# Altium PCB dl-6-0-0.PcbDoc
Units mm, origin at the board's own origin, x right, y up, seen from the top; angles counter-clockwise.
Board outline 152.4 x 101.6 mm, 2 copper layers (Top Layer, Bottom Layer); 36 components, 37 nets, 143 pads, 34 vias.
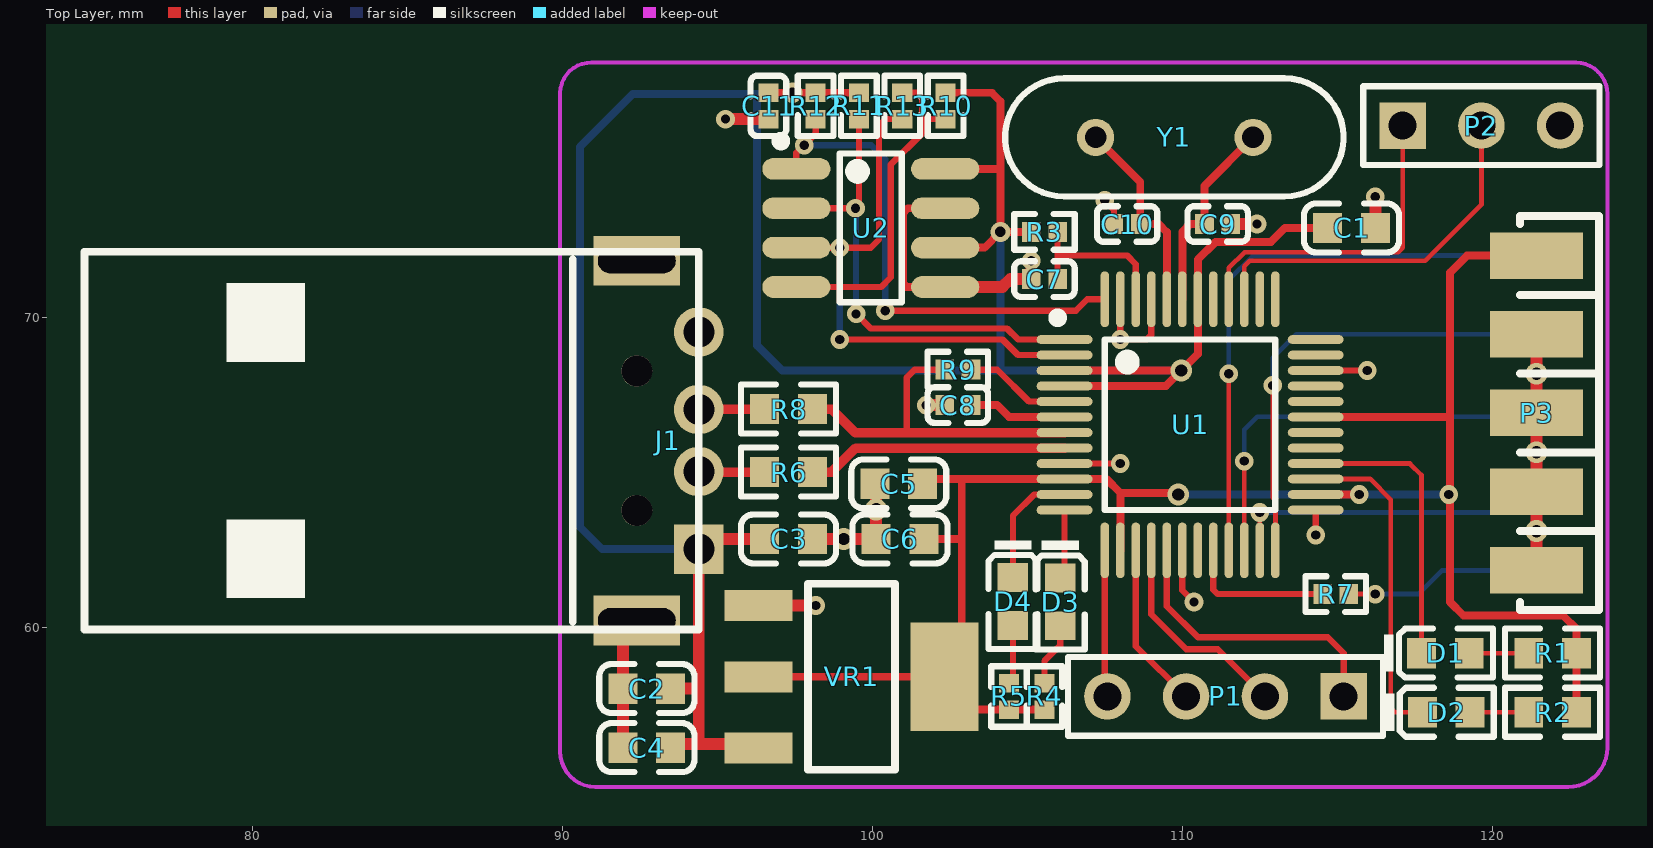
[diagram p0: Top Layer view]
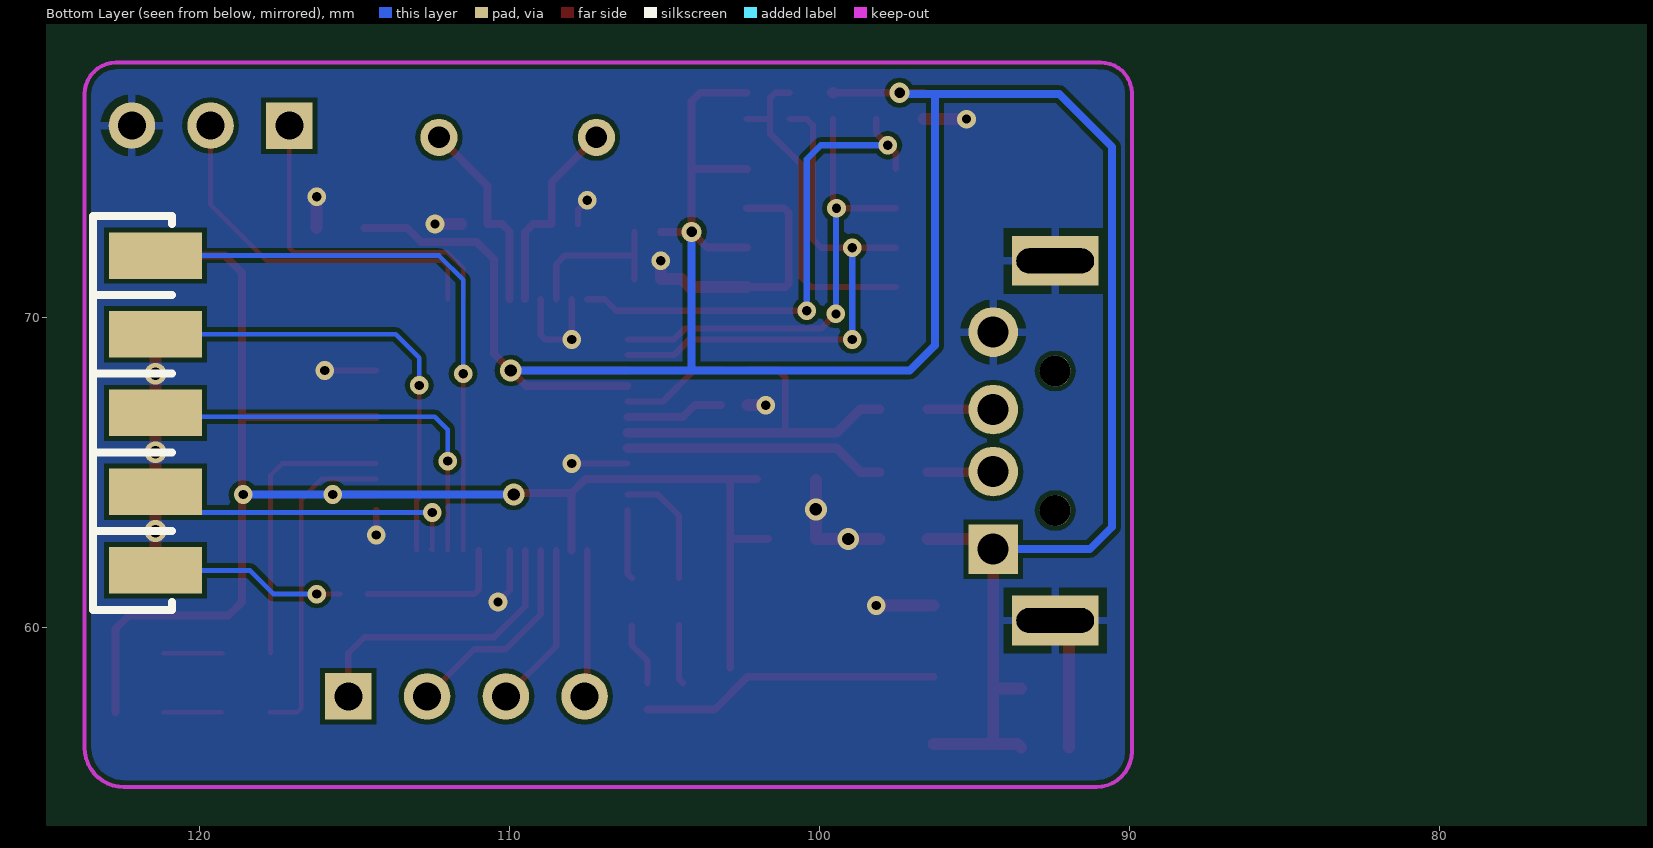
[diagram p1: Bottom Layer view, seen from below]

## Layer stack, top to bottom
Top Solder: solder mask 0.0102, Solder Resist, Dk 3.5
Top Layer: signal copper 0.0356
Dielectric 1: dielectric 0.32, FR-4, Dk 4.8
Bottom Layer: signal copper 0.0356
Bottom Solder: solder mask 0.0102, Solder Resist, Dk 3.5

## Board outline
25.4,25.4 177.8,25.4 177.8,127 25.4,127

## Design rules (kind name [scope] priority, off if disabled: settings)
Clearance [All] p1: gap=0.152 ignorepadtopadclearanceinfootprint=FALSE except(0: Arc-Hole Track-Hole SMDPad-Hole THPad-Hole Via-Hole Fill-Hole Poly-Hole Region-Hole Text-Hole; 0.127: Arc-Arc Arc-Track Arc-SMDPad Arc-THPad Arc-Via Track-Track Track-SMDPad Track-THPad Track-Via; 0.254: Arc-Text Track-Text SMDPad-Text THPad-Text Via-Text Fill-Text Poly-Text Region-Text Text-Text)
DiffPairsRouting [All] p1: maxlimit=0.254 minlimit=0.152 mostfreqgap=0.254 toplayer_minwidth=0.152 toplayer_maxwidth=0.381 toplayer_prefwidth=0.381 bottomlayer_minwidth=0.152 bottomlayer_maxwidth=0.381 bottomlayer_prefwidth=0.381 maxuncoupledlength=12.7
PolygonConnect [All] p1: thpad.connectstyle=Relief thpad.reliefconductorwidth=0.254 thpad.reliefentries=4 thpad.polygonreliefangle="90 Angle" thpad.airgapwidth=0.254 smdpad.connectstyle=Relief smdpad.reliefconductorwidth=0.254 smdpad.reliefentries=4 smdpad.polygonreliefangle="90 Angle" smdpad.airgapwidth=0.254 via.connectstyle=Direct via.reliefconductorwidth=0.254 via.reliefentries=4 via.polygonreliefangle="90 Angle" via.airgapwidth=0.254
RoutingVias [All] p1: holewidth=0.711 width=1.27 viastyle="Through Hole" minholewidth=0.3 minwidth=0.6 maxholewidth=0.711 maxwidth=1.27
SolderMaskExpansion [All] p1: expansion=0.102
Width [All] p1: maxlimit=1.524 minlimit=0.152 preferedwidth=0.254 minimp=50.000000 maximp=50.000000 favimp=50.000000
29 further rules are at their usual default settings.

## Classes and differential pairs
differential pair USB0R: +USB0R_P -USB0R_N
differential pair USB0D: +USB0D_P -USB0D_N

## Components (designator, comment, footprint, x,y, rotation, side; value= is the part's Value field where it differs from the comment)
C1 "22uF (226) 20% 6.3V" 0603_C 115.443,72.898 r0 top
C2 "1uF (105) 10% 50V" 0603_C 92.71,58.039 r180 top
C3 "10nF (103) 10% 50V" 0603_C 97.282,62.865 r0 top
C4 "100nF (104) 10% 50V" 0603_C 92.71,56.134 r180 top
C5 "100nF (104) 10% 50V" 0603_C 100.838,64.643 r0 top
C6 "100nF (104) 10% 50V" 0603_C 100.877,62.865 r0 top
C7 "100nF (104) 10% 16V" 0402_C 105.537,71.247 r0 top
C8 "33nF (333) 20% 50V" 0402_C 102.743,67.183 r180 top
C9 "27pF (270) 5% 50V" 0402_C 111.125,73.025 r180 top
C10 "27pF (270) 5% 50V" 0402_C 108.204,73.025 r0 top
C11 "100nF (104) 10% 16V" 0402_C 96.633,76.835 r270 top
D1 "蓝灯 0603" 0603_LED_S1 118.471,59.182 r0 top
D2 "黄灯 0603" 0603_LED_S1 118.499,57.277 r0 top
D3 "绿灯 0603" 0603_LED_S1 106.045,60.833 r270 top
D4 "红灯 0603" 0603_LED_S1 104.521,60.847 r270 top
J1 "USB-MINI-B" "U-G-04WD-W-01 公头" 84.861,66.04 r270 top locked
P1 "Header 4" HDR1X4 115.189,57.785 r180 top
P2 "Header 3" HDR1X3 117.094,76.2 r0 top
P3 "Header 5X2A" "SMT HEADER 5*2" 121.412,66.929 r0 top
R1 "220Ω (2200) ±1%" 0603_R 121.928,59.182 r180 top
R2 "220Ω (2200) ±1%" 0603_R 121.928,57.277 r180 top
R3 "470Ω (4700) ±1%" 0402_R 105.537,72.771 r180 top
R4 "220Ω (2200) ±1%" 0402_R 105.537,57.785 r90 top
R5 "220Ω (2200) ±1%" 0402_R 104.394,57.785 r90 top
R6 "27Ω (27R0) ±1%" 0603_R 97.282,65.024 r0 top
R7 "0Ω (0R0) ±1%" 0402_R 114.935,61.087 r0 top
R8 "27Ω (27R0) ±1%" 0603_R 97.282,67.056 r0 top
R9 "1.5KΩ (1501) ±1%" 0402_R 102.743,68.326 r0 top
R10 "10KΩ (1002) ±1%" 0402_R 102.348,76.835 r90 top
R11 "10KΩ (1002) ±1%" 0402_R 99.554,76.835 r90 top
R12 "10KΩ (1002) ±1%" 0402_R 98.157,76.835 r90 top
R13 "2.2KΩ (2201) ±1%" 0402_R 100.951,76.835 r270 top
U1 "FT2232D" LC-LQFP-48_7x7x05P 110.236,66.548 r270 top locked
U2 "AT93C46D" LC-SOIC-8_150mil 99.935,72.898 r270 top locked
VR1 "AMS1117-3.3" SOT-223 99.314,58.42 r180 top
Y1 "6MHz" XTAL-RAD-0.2 109.728,75.819 r0 top locked

## Footprints (in the part's own frame and the unit in brackets; to place one, negate y for a bottom-side part, rotate by r counter-clockwise, add the part's x,y. Pads: shape width x height; smd on the part's side, far side on the other; paste and mask are expansions set on the pad)
0402_C [mm]
  rect 0.6x0.65 smd mask+0.051: 1(-0.425,0) 2(0.425,0)
  silkscreen extent -0.97,-0.58 0.97,0.58, body extent -0.48,-0.3 0.52,0.3, height 0.2
0402_R [mm]
  rect 0.6x0.65 smd mask+0.051: 1(-0.425,0) 2(0.425,0)
  silkscreen extent -0.97,-0.58 0.97,0.58, body extent -0.57,-0.27 0.58,0.28, height 0.41
0603_C [mm]
  rect 0.93x0.98 smd: 1(-0.77,0) 2(0.77,0)
  silkscreen extent -1.53,-0.79 1.54,0.79, body extent -0.8,-0.4 0.8,0.4, height 0.3
0603_LED_S1 [mm]
  rect 0.93x0.98 smd: A(0.77,0) K(-0.77,0)
  silkscreen extent -1.97,-0.79 1.54,0.79, body extent -0.8,-0.4 0.8,0.4, height 0.6
0603_R [mm]
  rect 0.93x0.98 smd: 1(-0.77,0) 2(0.77,0)
  silkscreen extent -1.53,-0.79 1.54,0.79, body extent -0.85,-0.4 0.85,0.4, height 0.56
HDR1X3 [mm] "Connector; Header; 3 Position"
  rect 1.5x1.5 hole 0.9: 1(0,0)
  round 1.5 hole 0.9: 2(2.54,0) 3(5.08,0)
  silkscreen extent -1.27,-1.27 6.35,1.27, body extent -1.27,-1.27 6.35,1.27, height 7.58
HDR1X4 [mm] "Connector; Header; 4 Position"
  rect 1.5x1.5 hole 0.9: 1(0,0)
  round 1.5 hole 0.9: 2(2.54,0) 3(5.08,0) 4(7.62,0)
  silkscreen extent -1.27,-1.27 8.89,1.27, body extent -1.27,-1.27 8.89,1.27, height 7.58
LC-LQFP-48_7x7x05P [mm] "FT2232D"
  oval 0.28x1.8 smd mask+0.051: 1(-2.75,-4.05) 2(-2.25,-4.05) 3(-1.75,-4.05) 4(-1.25,-4.05) 5(-0.75,-4.05) 6(-0.25,-4.05) 7(0.25,-4.05) 8(0.75,-4.05) 9(1.25,-4.05) 10(1.75,-4.05) 11(2.25,-4.05) 12(2.75,-4.05) 25(2.75,4.05) 26(2.25,4.05) 27(1.75,4.05) 28(1.25,4.05) 29(0.75,4.05) 30(0.25,4.05) 31(-0.25,4.05) 32(-0.75,4.05) 33(-1.25,4.05) 34(-1.75,4.05) 35(-2.25,4.05) 36(-2.75,4.05)
  oval 1.8x0.28 smd mask+0.051: 13(4.05,-2.75) 14(4.05,-2.25) 15(4.05,-1.75) 16(4.05,-1.25) 17(4.05,-0.75) 18(4.05,-0.25) 19(4.05,0.25) 20(4.05,0.75) 21(4.05,1.25) 22(4.05,1.75) 23(4.05,2.25) 24(4.05,2.75) 37(-4.05,2.75) 38(-4.05,2.25) 39(-4.05,1.75) 40(-4.05,1.25) 41(-4.05,0.75) 42(-4.05,0.25) 43(-4.05,-0.25) 44(-4.05,-0.75) 45(-4.05,-1.25) 46(-4.05,-1.75) 47(-4.05,-2.25) 48(-4.05,-2.75)
  silkscreen extent -3.6,-4.42 2.75,2.75
LC-SOIC-8_150mil [mm]
  oval 0.7x2.2 smd: 1(-1.905,-2.4) 2(-0.635,-2.4) 3(0.635,-2.4) 4(1.905,-2.4) 5(1.905,2.4) 6(0.635,2.4) 7(-0.635,2.4) 8(-1.905,2.4)
  silkscreen extent -2.95,-3.05 2.4,1
"SMT HEADER 5*2" [mm]
  rect 3x1.5 smd: 1(0,5.08) 2(0,2.54) 3(0,0) 4(0,-2.54) 5(0,-5.08)
  rect 3x1.5 smd far side: 6(0,5.08) 7(0,2.54) 8(0,0) 9(0,-2.54) 10(0,-5.08)
  silkscreen extent -0.53,-6.35 2.01,6.35
SOT-223 [mm]
  rect 2.2x1 smd: 1(3,-2.3) 2(3,0) 3(3,2.3)
  rect 2.2x3.5 smd: 2(-3,0)
  silkscreen extent -1.4,-3 1.4,3, body extent -3.49,-3.24 3.49,3.24, height 1.64
"U-G-04WD-W-01 公头" [mm]
  rect 1.6x1.6 hole 1: 1(3.504,9.525)
  round 1.6 hole 1: 2(1.004,9.525) 3(-0.996,9.525) 4(-3.496,9.525)
  rect 1.6x2.8 hole 0.8 slot 2.5 at 90 deg: 5(-5.796,7.525) 6(5.804,7.525)
  round 1 hole 1 unplated: ""(-2.246,7.525) ""(2.254,7.525)
  silkscreen extent -6.09,-10.29 6.1,9.53
XTAL-RAD-0.2 [mm] "Radial Cap, Thru-Hole; 2 Leads; 0.2 in Pin Spacing"
  round 1.2 hole 0.7: 1(-2.54,0) 2(2.54,0)
  silkscreen extent -5.46,-1.91 5.46,1.91, body extent -5.33,-2.05 5.33,2.05, height 3.22

## Part data
C1: library part "0603 22uF (226) 20% 6.3V", "贴片电容", Package=0603, SuppliersPartNumber=C59461, ComponentLink1Description=供应商链接, ComponentLink1URL=http://www.szlcsc.com/product/details_60514.html, Supplier=LC
C2: library part "0603 1uF (105) 10% 50V", "贴片电容", Package=0603, SuppliersPartNumber=C15849, ComponentLink1Description=供应商链接, ComponentLink1URL=http://www.szlcsc.com/product/details_16531.html, Supplier=LC
C3: library part "0603 10nF (103) 10% 50V", "贴片电容", Package=0603, SuppliersPartNumber=C57112, ComponentLink1Description=供应商链接, ComponentLink1URL=http://www.szlcsc.com/product/details_58143.html, Supplier=LC
C4 C5 C6: library part "0603 100nF (104) 10% 50V", "贴片电容", Package=0603, SuppliersPartNumber=C14663, ComponentLink1Description=供应商链接, ComponentLink1URL=http://www.szlcsc.com/product/details_15331.html, Supplier=LC
C7 C11: library part "0402 100nF (104) 10% 16V", "贴片电容", Package=0402, SuppliersPartNumber=C1525, ComponentLink1Description=供应商链接, ComponentLink1URL=http://www.szlcsc.com/product/details_1877.html, Supplier=LC
C8: library part "0402 33nF (333) 20% 50V", "贴片电容", Package=0402, SuppliersPartNumber=C1585, ComponentLink1Description=供应商链接, ComponentLink1URL=http://www.szlcsc.com/product/details_1937.html, Supplier=LC
C9 C10: library part "0402 27pF (270) 5% 50V", "贴片电容", Package=0402, SuppliersPartNumber=C1557, ComponentLink1Description=供应商链接, ComponentLink1URL=http://www.szlcsc.com/product/details_1909.html, Supplier=LC
D1: library part "0603 蓝灯", "发光二极管", Package=0603, SuppliersPartNumber=C72041, ComponentLink1Description=供应商链接, ComponentLink1URL=http://www.szlcsc.com/product/details_73150.html, Supplier=LC
D2: library part "0603 黄灯", "发光二极管", Package=0603, SuppliersPartNumber=C72038, ComponentLink1Description=供应商链接, ComponentLink1URL=http://www.szlcsc.com/product/details_73147.html, Supplier=LC
D3: library part "0603 绿灯", "发光二极管", Package=0603, SuppliersPartNumber=C72043, ComponentLink1Description=供应商链接, ComponentLink1URL=http://www.szlcsc.com/product/details_73152.html, Supplier=LC
D4: library part "0603 红灯", "发光二极管", Package=0603, SuppliersPartNumber=C2286, ComponentLink1Description=供应商链接, ComponentLink1URL=http://www.szlcsc.com/product/details_2659.html, Supplier=LC
J1: "USB 2.0, Right Angle, SMT, A Type, Receptacle, 5 Position, Black", PackageDocument=15-Nov-2002, ComponentLink1Description="Manufacturer Link", ComponentLink1URL=http://www.tycoelectronics.com/, ComponentLink2Description="Packaging Specification", ComponentLink2URL=http://ecommas.tycoelectronics.com/commerce/DocumentDelivery/DDEController?Action=showdoc&DocId=Customer+Drawing%7F440478%7FB%7Fpdf%7FEnglish%7FC_440478_B.pdf, ContactMaterial="Phosphor Bronze", ContactPlating="Gold (30) over Nickel", DatasheetDocument=15-Nov-2002, DrillSize="Corresponds to nominal value.", HousingMaterial=Thermoplastic, PackageReference=440478, PanelGround=Without, PCB_Layout="Complies with manufacturer's recommendation.", Published=15-Jul-2004, Publisher="Altium Limited"
P1: "Header, 4-Pin", LatestRevisionDate=17-Jul-2002, LatestRevisionNote="Re-released for DXP Platform.", Publisher="Altium Limited"
P2: "Header, 3-Pin", LatestRevisionDate=17-Jul-2002, LatestRevisionNote="Re-released for DXP Platform.", Publisher="Altium Limited"
P3: "Header, 5-Pin, Dual row", LatestRevisionDate=17-Jul-2002, LatestRevisionNote="Re-released for DXP Platform.", Publisher="Altium Limited"
R1 R2: library part "0603 220Ω (2200) 1%", "贴片电阻", Package=0603, SuppliersPartNumber=C22962, ComponentLink1Description=供应商链接, ComponentLink1URL=http://www.szlcsc.com/product/details_23689.html, Supplier=LC
R3: library part "0402 470Ω (4700) 1%", "贴片电阻", Package=0402, SuppliersPartNumber=C25117, ComponentLink1Description=供应商链接, ComponentLink1URL=http://www.szlcsc.com/product/details_25860.html, Supplier=LC
R4 R5: library part "0402 220Ω (2200) 1%", "贴片电阻", Package=0402, SuppliersPartNumber=C25091, ComponentLink1Description=供应商链接, ComponentLink1URL=http://www.szlcsc.com/product/details_25834.html, Supplier=LC
R6 R8: library part "0603 27Ω (27R0) 1%", "贴片电阻", Package=0603, SuppliersPartNumber=C25190, ComponentLink1Description=供应商链接, ComponentLink1URL=http://www.szlcsc.com/product/details_25933.html, Supplier=LC
R7: library part "0402 0Ω (0R0) 1%", "贴片电阻", Package=0402, SuppliersPartNumber=C17168, ComponentLink1Description=供应商链接, ComponentLink1URL=http://www.szlcsc.com/product/details_17853.html, Supplier=LC
R9: library part "0402 1.5KΩ (1501) 1%", "贴片电阻", Package=0402, SuppliersPartNumber=C25867, ComponentLink1Description=供应商链接, ComponentLink1URL=http://www.szlcsc.com/product/details_26610.html, Supplier=LC
R10 R11 R12: library part "0402 10KΩ (1002) 1%", "贴片电阻", Package=0402, SuppliersPartNumber=C25744, ComponentLink1Description=供应商链接, ComponentLink1URL=http://www.szlcsc.com/product/details_26487.html, Supplier=LC
R13: library part "0402 2.2KΩ (2201) 1%", "贴片电阻", Package=0402, SuppliersPartNumber=C25879, ComponentLink1Description=供应商链接, ComponentLink1URL=http://www.szlcsc.com/product/details_26622.html, Supplier=LC
VR1: library part "SOT-223 AMS1117-3.3", "低压差线性稳压(LDO)", Package=SOT-223, SuppliersPartNumber=C6186, ComponentLink1Description=供应商链接, ComponentLink1URL=http://www.szlcsc.com/product/details_6652.html, Supplier=LC
Y1: library part XTAL, "晶体振荡器", LatestRevisionDate=17-Jul-2002, LatestRevisionNote="Re-released for DXP Platform.", PackageReference=R38, Published=8-Jun-2000, Publisher="Altium Limited"

## Via types
v1: diameter 0.6, hole 0.3, Top Layer to Bottom Layer, tented both sides, 25 vias
v2: diameter 0.7, hole 0.4, Top Layer to Bottom Layer, tented both sides, 7 vias
v3: diameter 0.65, hole 0.34, Top Layer to Bottom Layer, tented both sides, 2 vias

## Nets (pads, with @x,y where several pads share a name; then routed paths per layer and width w, separated by ;. In a path a pad name is that pad's centre, name@x,y a point inside that pad or via, vN(x,y) a via of type N, cw(c..) or ccw(c..) an arc to the next point about the centre after c; other vN are vias at no path point)
3.3V: C5.2 C6.2 P3.1 R1.1 R2.1 R4.1 R5.1 U1.10 U1.14 U1.26 U1.31 VR1.2 | length 62.2
  Top Layer w0.254: VR1.2@96.314,58.42 102.314,58.42 103.374,57.36 R5.1 R4.1 ; C6.2 102.87,62.865 ; C5.2@102.009,64.798 102.87,64.798 ; VR1.2@102.87,58.722 102.87,62.865 ; U1.14 107.986,64.353 ; v2(109.855,64.298) 109.8,64.353 107.986,64.353 ; U1.26 v1(115.697,64.298) ; U1.31 118.614,66.798 118.618,66.802 ; v1(118.582,64.298) v1@118.618,64.262 ; P3.1 119.172,72.009 118.618,71.455 118.618,66.802 ; R2.1 R1.1 122.698,59.966 122.273,60.391 119.06,60.391 118.618,60.833 v1@118.618,64.262 ; 102.87,62.865 102.87,64.798 ; 102.87,64.798 U1.10 107.541,64.798 107.986,64.353 ; v1@118.618,64.262 118.618,66.802
  Bottom Layer w0.254: v2(109.855,64.298) v1(115.697,64.298) v1(118.582,64.298)
5V: C1.1 C2.1 C3.1 C4.1 C11.1 J1.1 R3.2 R10.2 R11.2 R12.2 U1.3 U1.4 U1.42 U2.6 U2.8 VR1.3 | length 92.9
  Top Layer w0.254: C11.1 v3(97.409,77.26) R11.2 ; U2.6 103.608,72.263 v3(104.116,72.771) ; U2.8 104.116,74.803 ; R10.2 103.842,77.26 104.116,76.986 104.116,74.803 ; R3.2 v3(104.116,72.771) ; U1.4 109.454,67.798 v2(109.954,68.298) ; U1.3 v2(109.954,68.298) ; C1.1 113.292,72.898 112.84,72.446 111.054,72.446 110.486,71.878 U1.42 110.486,68.83 v2(109.954,68.298) ; v3(104.116,72.771) 104.116,74.803
  Top Layer w0.381: C4.1 93.593,56.247 94.386,56.247 ; C2.1 94.259,58.039 94.386,58.166 ; VR1.3@96.314,56.247 94.386,56.247 ; C3.1 94.715,62.865 J1.1 94.386,58.166 ; 94.386,56.247 94.386,58.166
  Bottom Layer w0.254: J1.1 91.272,62.536 90.551,63.257 90.551,75.508 92.259,77.216 96.266,77.216 ; v3@97.409,77.216 96.266,77.216 ; 104.116,68.322 v3(104.116,72.771) ; v2(109.954,68.298) 104.14,68.298 97.078,68.298 96.266,69.11 96.266,77.216
EECLK: R11.1 U1.1 U2.2 | length 15.3
  Top Layer w0.203: U2.2 v1(99.441,73.533) 99.554,73.646 R11.1 ; v1(99.462,70.125) 99.933,69.654 104.331,69.654 104.687,69.298 U1.1
  Bottom Layer w0.203: v1(99.441,73.533) 99.462,73.512 v1(99.462,70.125)
EECS: R12.1 U1.48 U2.1 | length 16.8
  Top Layer w0.203: U2.1 97.535,75.324 98.157,75.946 R12.1 ; v1(100.399,70.231) 106.553,70.231 106.92,70.598 U1.48
  Bottom Layer w0.203: v1(97.79,75.565) 99.949,75.565 100.399,75.115 v1(100.399,70.231)
EEDATA: R13.2 U1.2 U2.3 | length 17.7
  Top Layer w0.203: U2.3 v1(98.933,72.263) 99.935,72.263 100.203,72.531 100.203,76.214 100.399,76.41 R13.2 ; v1(98.933,69.298) 104.184,69.298 104.684,68.798 U1.2
  Bottom Layer w0.203: v1(98.933,69.298) v1(98.933,72.263)
FT_RXD: P2.2 U1.39 | length 12.1
  Top Layer w0.152: U1.39 111.986,71.664 112.158,71.836 117.822,71.836 119.634,73.648 P2.2
FT_TXD: P2.1 U1.40 | length 10.8
  Top Layer w0.152: U1.40 111.486,71.608 111.994,72.116 116.947,72.116 117.094,72.263 P2.1
GND: C1.2 C2.2 C3.2 C4.2 C5.1 C6.1 C7.1 C8.2 C9.1 C10.1 C11.2 J1.4 J1.5 J1.6 P2.3 P3.2 P3.3 P3.4 P3.5 U1.9 U1.18 U1.25 U1.34 U1.45 U1.47 U2.5 U2.7 VR1.1 | length 40.7
  Top Layer w0.203: U1.9 v1(107.986,65.298) ; v1(107.486,73.787) 107.779,73.494 C10.1 ; U1.47 v1(107.986,69.298) 108.839,69.298 108.986,69.445 U1.45 ; U1.18 109.986,61.21 v1(110.363,60.833) ; v1(114.286,62.992) U1.25 ; U1.34 v1(115.951,68.298)
  Top Layer w0.254: U2.5 101.092,70.993 100.981,71.104 100.981,73.383 101.131,73.533 U2.7
  Top Layer w0.381: C4.2 C2.2 91.94,59.79 J1.6 ; v1(95.25,76.41) C11.2 ; VR1.1 v1@98.157,60.72 ; C3.2 C6.1 v2(100.107,63.817) C5.1@100.107,64.77 ; v1(101.727,67.183) C8.2 ; U2.5 104.184,70.993 104.438,71.247 C7.1 ; C7.1@105.029,71.33 C7.1 ; v1(105.112,71.836) C7.1 ; C9.1 v1(112.395,73.025) ; C1.2 v1(116.213,73.906) ; P3.5 v2(121.412,63.119) P3.4 v2(121.412,65.659) P3.3 v2(121.412,68.196) P3.2
  other v1: 98.157,60.72
  other v2: 99.06,62.865
GPIOH0: P1.3 U1.15 | length 5.4
  Top Layer w0.203: U1.15 108.486,59.408 P1.3
GPIOH1: P1.4 U1.13 | length 4.8
  Top Layer w0.203: P1.4@107.486,57.658 U1.13
GPIOH2: D3.K U1.12 | length 2.3
  Top Layer w0.203: D3.K 106.186,61.744 U1.12
GPIOH3: D4.K U1.11 | length 3.9
  Top Layer w0.203: D4.K 104.521,63.615 105.204,64.298 U1.11
GPIOL0: R7.1 U1.20 | length 4.9
  Top Layer w0.203: U1.20 110.986,61.226 111.125,61.087 R7.1@114.554,61.087
GPIOL1: U1.19
GPIOL2: P1.1 U1.17 | length 9.5
  Top Layer w0.203: U1.17 109.486,60.694 110.49,59.69 114.681,59.69 115.189,59.182 P1.1
GPIOL3: P1.2 U1.16 | length 6.8
  Top Layer w0.203: U1.16 108.986,60.432 110.109,59.309 111.125,59.309 P1.2
JTAG_TCK: P3.7 U1.24 | length 15.1
  Top Layer w0.152: v1(112.903,67.818) 112.903,64.199 112.989,64.113 112.989,62.501 U1.24
  Bottom Layer w0.152: v1(112.903,67.818) 112.903,68.707 113.665,69.469 P3.7
JTAG_TDI: P3.9 U1.23 | length 9.5
  Top Layer w0.152: v1(112.486,63.718) U1.23 U1.23@112.522,62.534
  Bottom Layer w0.152: v1(112.486,63.718) P3.9@120.741,63.718
JTAG_TDO: P3.8 U1.22 | length 13.5
  Top Layer w0.152: U1.22 111.983,62.501 111.983,65.374 v1(111.986,65.377)
  Bottom Layer w0.152: v1(111.986,65.377) 111.986,66.393 112.4,66.807 121.29,66.807 P3.8
JTAG_TMS: P3.6 U1.21 | length 19
  Top Layer w0.152: U1.21 111.483,62.501 111.483,68.196 v1(111.486,68.199)
  Bottom Layer w0.152: v1(111.486,68.199) 111.486,71.227 112.268,72.009 P3.6
NetC7_2: C7.2 R3.1 U1.46 | length 5.3
  Top Layer w0.203: C7.2 105.962,72.009 ; R3.1 105.962,72.009 ; U1.46 108.486,71.727 108.204,72.009 105.962,72.009
NetC8_1: C8.1 U1.6 | length 3.2
  Top Layer w0.254: C8.1 104.013,67.183 104.398,66.798 U1.6
NetC9_2: C9.2 U1.43 Y1.2 | length 6.8
  Top Layer w0.254: U1.43 109.986,72.775 110.236,73.025 C9.2 110.7,74.251 Y1.2 ; Y1.2@111.994,75.819 Y1.2 ; Y1.2@112.395,75.819 Y1.2
NetC10_2: C10.2 U1.44 Y1.1 | length 6.5
  Top Layer w0.254: Y1.1 108.629,74.378 C10.2 109.224,73.025 109.486,72.763 U1.44
NetD1_A: D1.A R1.2 | length 1.9
  Top Layer w0.152: D1.A R1.2
NetD2_A: D2.A R2.2 | length 1.9
  Top Layer w0.152: D2.A R2.2
NetD3_A: D3.A R4.2 | length 2.1
  Top Layer w0.203: R4.2 105.537,58.928 106.045,59.436 D3.A
NetD4_A: D4.A R5.2 | length 1.9
  Top Layer w0.203: R5.2 104.521,58.337 D4.A
NetR9_2: R9.2 U1.5 | length 3.4
  Top Layer w0.203: R9.2 104.013,68.326 105.041,67.298 U1.5
NetR10_1: R10.1 R13.1 U2.4 | length 10.8
  Top Layer w0.203: U2.4 100.272,70.993 100.584,71.305 100.584,74.944 101.586,75.946 101.586,76.41 ; R13.1 101.415,77.26 101.586,77.089 101.586,76.41 ; R10.1 101.586,76.41
RESET: P3.10 R7.2 | length 6.3
  Top Layer w0.152: R7.2@115.443,61.087 v1(116.205,61.087)
  Bottom Layer w0.152: v1(116.205,61.087) 117.602,61.087 118.364,61.849 P3.10
RXD_LED: D1.K U1.28 | length 9.3
  Top Layer w0.152: U1.28 117.328,65.298 117.701,64.925 D1.K
TXD_LED: D2.K U1.27 | length 10.5
  Top Layer w0.152: U1.27 114.289,64.801 116.047,64.801 116.713,64.135 116.713,57.404 116.84,57.277 D2.K
USB0D_N: R6.2 U1.8 | length 8.5
  Top Layer w0.305: R6.2 98.669,65.024 99.443,65.798 U1.8
USB0D_P: R8.2 R9.1 U1.7 | length 11.6
  Top Layer w0.203: 101.092,66.298 101.092,68.072 101.346,68.326 R9.1
  Top Layer w0.305: R8.2 98.669,67.056 99.427,66.298 101.092,66.298 U1.7
USB0R_N: J1.2 R6.1 | length 2.1
  Top Layer w0.305: J1.2 94.398,65.024 R6.1
USB0R_P: J1.3 R8.1 | length 2.1
  Top Layer w0.305: J1.3 94.406,67.056 R8.1
pads on no net: J1. U1.29 U1.30 U1.32 U1.33 U1.35 U1.36 U1.37 U1.38 U1.41

## Polygon pours and split planes (outlines as drawn)
GND on Bottom Layer "GND_L02_P000" (solid, remove dead copper, pour order 0): 89.916,78.232 123.698,78.232 123.698,54.864 89.916,54.864

## Keep-outs
Keep-Out Layer:
  lines w0.127: 89.916,56.007 ccw(c91.059,56.007) 91.059,54.864 122.428,54.864 ccw(c122.428,56.134) 123.698,56.134 123.698,77.216 ccw(c122.682,77.216) 122.682,78.232 90.932,78.232 ccw(c90.91,77.238) 89.916,77.26 89.916,56.007